# EAGLE board shield_motor (EAGLE 7.4.0)
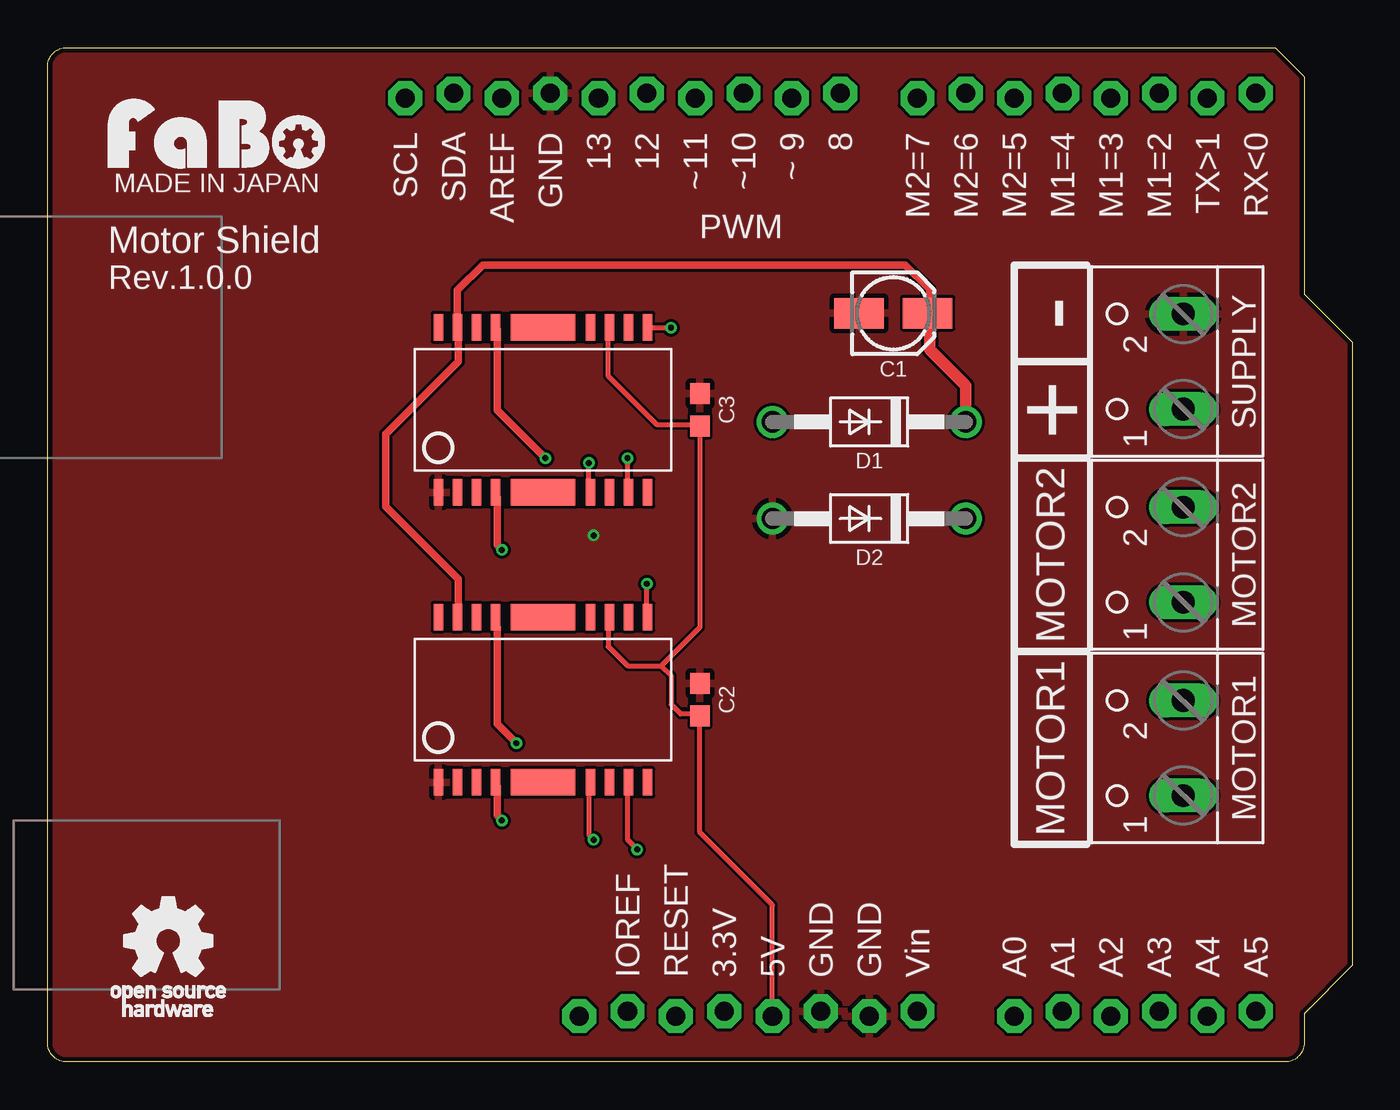
[diagram p0: board, top side]
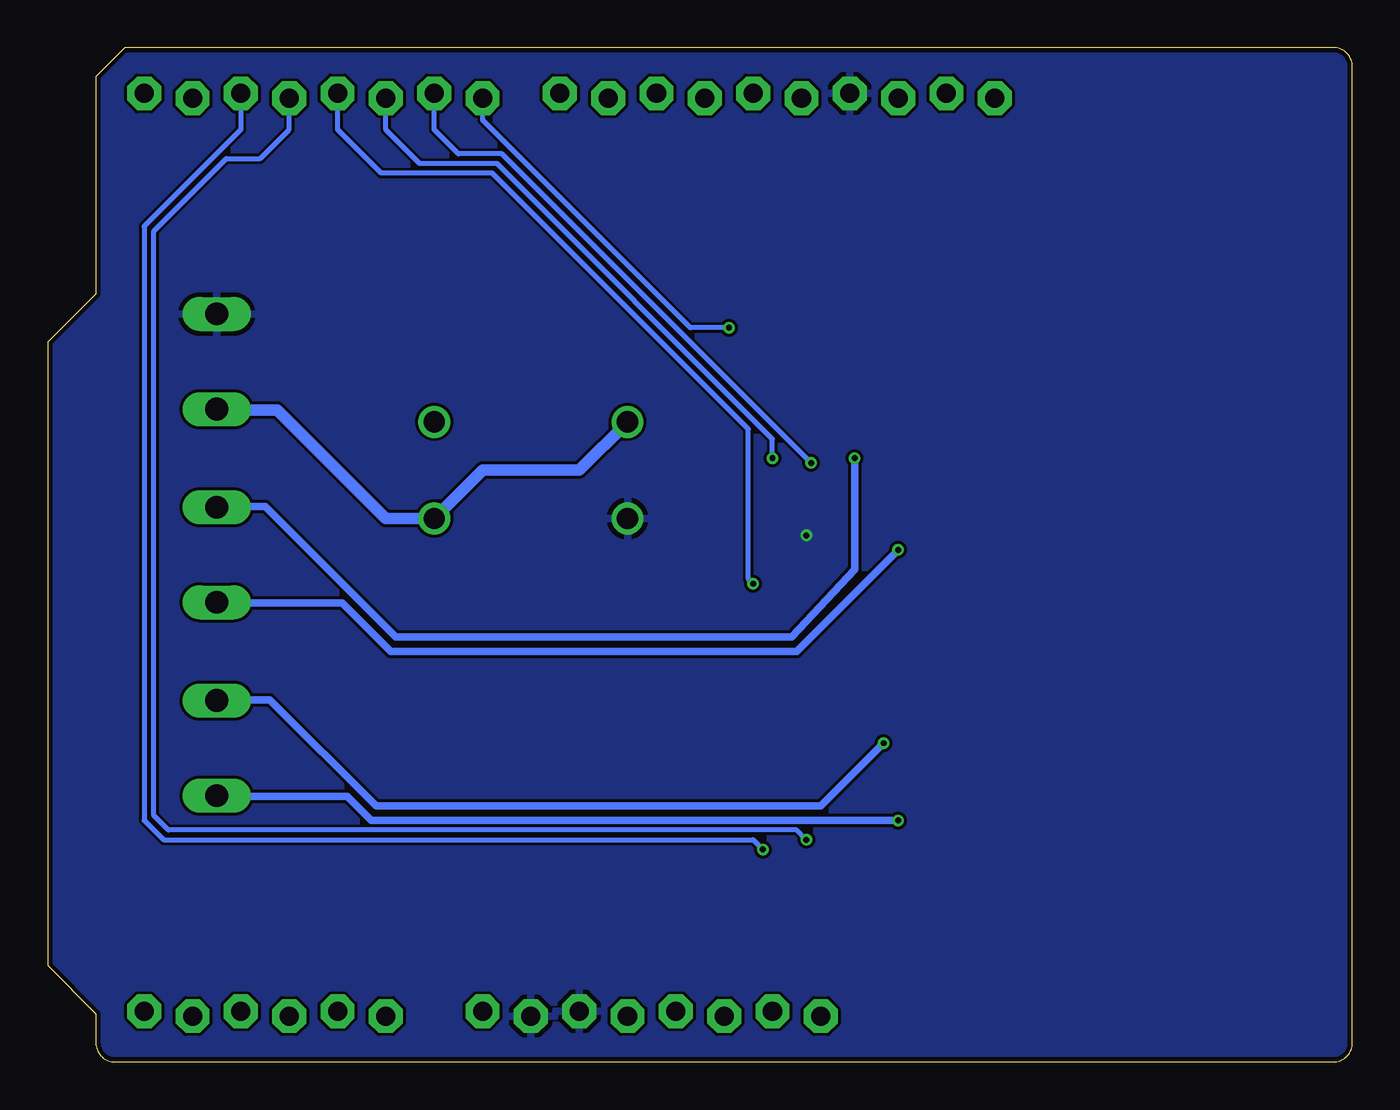
[diagram p1: board, bottom side, seen from below]

Size 68.58 x 53.34 mm. Coordinates in mm from the lower left corner, seen from the top.
Copper layers (1*16): Top 0.035mm / dielectric 1.5mm / Bottom 0.035mm
Design rules "Elecrow_2-layer_eagle_rule": minimum track width 6mil, minimum drill 12mil, track to track 6mil, track to pad 6mil, pad to pad 6mil, via to via 6mil, smd to smd 0mil, copper to edge 10mil, drill to drill 10mil, minimum pad ring 10mil, minimum via ring 6mil, stop-mask expansion 2mil, vias tented up to drill 100mil, thermal gap 10mil

## Footprints (pad centres in the part's own frame; a part is rotated, then mirrored left to right if it is on the bottom)
153CLV-0405 = smd 2.6 x 1.6: + 1.8,0; - -1.8,0
EIA0603 = smd 1.1 x 1: 1 -0.85,0; 2 0.85,0
DO41-10 = drill 1.118: A 5.08,0; C -5.08,0
MOTOR-DRIVER-TA7291FG = smd 0.5 x 1.4: 1 -5.5,-4.34; 2 -4.5,-4.34; 3 -3.5,-4.34; 4 -2.5,-4.34; 5 2.5,-4.34; 6 3.5,-4.34; 7 4.5,-4.34; 8 5.5,-4.34; 9 5.5,4.34; 10 4.5,4.34; 11 3.5,4.34; 12 2.5,4.34; 13 -2.5,4.34; 14 -3.5,4.34; 15 -4.5,4.34; 16 -5.5,4.34 | smd 3.4 x 1.4: 17 0,-4.34; 18 0,4.34
W237-102 = drill 1.194 long: 1 -2.5,-1.27; 2 2.5,-1.27
ARDUINO_UNO_R3_NOLABEL = drill 1 pad 1.778 octagon: 3V3 35.56,2.667; 5V 38.1,2.413; A0 50.8,2.413; A1 53.34,2.667; A2 55.88,2.413; A3 58.42,2.667; A4 60.96,2.413; A5 63.5,2.667; AREF 23.876,50.673; D0 63.5,50.927; D1 60.96,50.673; D2 58.42,50.927; D3 55.88,50.673; D4 53.34,50.927; D5 50.8,50.673; D6 48.26,50.927; D7 45.72,50.673; D8 41.656,50.927; D9 39.116,50.673; D10 36.576,50.927; D11 34.036,50.673; D12 31.496,50.927; D13 28.956,50.673; GND1 43.18,2.413; GND2 40.64,2.667; GND3 26.416,50.927; IOREF 30.48,2.667; RESERVED 27.94,2.413; RESET 33.02,2.413; SCL 18.796,50.673; SDA 21.336,50.927; VIN 45.72,2.667

## Placement (x,y rotation side)
C1  100uf  [153CLV-0405]  44.45,39.37 0 top
C2  0.1uF  [EIA0603]  34.29,19.05 90 top
C3  0.1uF  [EIA0603]  34.29,34.29 90 top
D1  1N4004  [DO41-10]  43.18,33.66 180 top
D2  1N4004  [DO41-10]  43.18,28.57 180 top
IC1  [MOTOR-DRIVER-TA7291FG]  26.04,19.05 0 top
IC2  [MOTOR-DRIVER-TA7291FG]  26.04,34.29 0 top
MOTOR1  [W237-102]  58.42,16.51 90 top
MOTOR2  [W237-102]  58.42,26.67 90 top
SUPPLY  [W237-102]  58.42,36.83 90 top
U1  [ARDUINO_UNO_R3_NOLABEL]  0,0 0 top
U$6  [LOGO_OSHW_T_M]  6.35,6.35 0 top
U$7  [LOGO_FABO_M]  8.89,46.99 0 top

## Library data of the parts
C1 = resistor
C2 C3 IC1 IC2 U$6 U$7 = FaBo-etc
D1 D2 = diode
MOTOR1 MOTOR2 SUPPLY = con-wago-500; MPN: 237-102; OC_FARNELL: unknown; OC_NEWARK: 70K9898
U1 = FaBo-Boards

## Nets
3V3: U1.3V3
5V: C2.1 C3.1 IC1.11 IC2.11 U1.5V
GND: C1.- C2.2 C3.2 D2.A IC1.1 IC2.1 SUPPLY.2 U1.GND1 U1.GND2 U1.GND3
M1_IN1: IC1.7 U1.D2
M1_IN2: IC1.9 U1.D4
M1_OUT1: IC1.4 MOTOR1.1
M1_OUT2: IC1.13 MOTOR1.2
M1_REF: IC1.5 U1.D3
M2_IN1: IC2.7 U1.D5
M2_IN2: IC2.9 U1.D7
M2_OUT1: IC2.4 MOTOR2.1
M2_OUT2: IC2.13 MOTOR2.2
M2_REF: IC2.5 U1.D6
N$1: D1.A D2.C SUPPLY.1
VIN: U1.VIN
VS: C1.+ D1.C IC1.15 IC2.15

## Tracks (layer width: path | path; a pad name or v marks a point on that pad's centre or on a via)
5V
  Top 0.254: U1.5V 38.1,8.26 34.29,12.06 C2.1 34.29,18.29 33.27,18.29 32.77,18.8 32.77,20.32 32.26,20.83 | IC1.11 29.54,22.93 29.46,22.86 29.46,21.84 30.48,20.83 32.26,20.83 | 32.26,20.83 34.29,22.86 C3.1 34.2,33.53 32,33.53 29.46,36.07 29.46,38.56 IC2.11
GND  (via drill 0.3)
  other vias: 28.7,27.69
  pour Bottom: -1.27,-1.27 69.85,-1.27 69.85,54.61 -1.27,54.61
  pour Top: -1.27,-1.27 69.85,-1.27 69.85,54.61 -1.27,54.61
M1_IN1  (via drill 0.3)
  Top 0.254: v30.99,11.18 30.48,11.68 30.48,14.65 IC1.7
  Bottom 0.254: U1.D2 58.42,49.02 63.5,43.94 63.5,12.7 62.48,11.68 31.5,11.68 v30.99,11.18
M1_IN2  (via drill 0.3)
  Top 0.254: IC1.9 31.5,23.43 v31.5,25.15
  Bottom 0.254: v31.5,25.15 31.75,25.4 31.75,33.27 45.21,46.74 51.05,46.74 53.34,49.02 U1.D4
M1_OUT1  (via drill 0.3)
  Top 0.406: IC1.4 23.54,14.56 23.62,14.48 23.62,12.95 v23.88,12.7
  Bottom 0.406: v23.88,12.7 51.56,12.7 52.83,13.97 59.65,13.97 MOTOR1.1
M1_OUT2  (via drill 0.3)
  Top 0.406: IC1.13 23.54,22.95 23.62,22.86 23.62,17.78 v24.64,16.76
  Bottom 0.406: v24.64,16.76 27.94,13.46 51.31,13.46 56.9,19.05 59.65,19.05 MOTOR1.2
M1_REF  (via drill 0.3)
  Top 0.254: IC1.5 28.45,14.62 28.45,11.94 v28.7,11.68
  Bottom 0.254: v28.7,11.68 29.21,12.19 62.23,12.19 62.99,12.95 62.99,43.69 59.18,47.5 57.4,47.5 55.88,49.02 U1.D3
M2_IN1  (via drill 0.3)
  Top 0.254: IC2.7 30.48,30 v30.48,31.75
  Bottom 0.254: v30.48,31.75 30.48,32.77 44.96,47.24 49.02,47.24 50.8,49.02 U1.D5
M2_IN2  (via drill 0.3)
  Top 0.254: IC2.9 31.5,38.61 v32.77,38.61
  Bottom 0.254: v32.77,38.61 34.8,38.61 45.72,49.53 U1.D7
M2_OUT1  (via drill 0.3)
  Top 0.406: IC2.4 23.54,29.8 23.62,29.72 23.62,27.18 v23.88,26.92
  Bottom 0.406: v23.88,26.92 29.21,21.59 50.55,21.59 53.09,24.13 59.18,24.13 59.22,24.17 MOTOR2.1
M2_OUT2  (via drill 0.3)
  Top 0.406: IC2.13 23.62,38.54 23.62,34.29 v26.16,31.75
  Bottom 0.406: v26.16,31.75 26.16,25.91 29.46,22.35 50.29,22.35 57.15,29.21 59.65,29.21 MOTOR2.2
M2_REF  (via drill 0.3)
  Top 0.254: IC2.5 28.45,30.04 v28.45,31.5
  Bottom 0.254: v28.45,31.5 44.7,47.75 46.99,47.75 48.26,49.02 U1.D6
N$1
  Bottom 0.61: SUPPLY.1 59.69,34.29 56.52,34.29 50.8,28.57 D2.C 45.72,31.11 40.64,31.11 D1.A
VS
  Top 0.406: 21.54,38.79 21.54,40.59 22.86,41.91 45.09,41.91 46.35,40.64 46.35,39.48 C1.+ | IC2.15 21.54,38.79 | 21.54,38.79 21.59,38.73 21.59,36.83 17.78,33.02 17.78,29.21 21.59,25.4 21.59,23.45 IC1.15
  Top 0.61: C1.+ 46.25,38.84 46.35,38.73 46.35,37.47 48.26,35.56 D1.C

## Text on the board
tPlace: SCL | SDA | AREF | GND | 13 | 12 | ~11 | ~10 | ~ 9 | 8 | M2=7 | M2=6 | M2=5 | M1=4 | M1=3 | M1=2 | TX>1 | RX<0 | MADE IN JAPAN | PWM | Motor Shield | Rev.1.0.0 | - | + | MOTOR2 | MOTOR1 | IOREF | RESET | 3.3V | 5V | GND | GND | Vin | A0 | A1 | A2 | A3 | A4 | A5